# Altium PCB Power_Board_Gan_Cuk.PcbDoc (part 3 of 4)
Units mil, origin at the board's own origin, x right, y up, seen from the top; angles counter-clockwise.
Board outline 9910 x 8913.25 mil, 5 copper layers (Top Layer, Middle 1, HF Layer, Middle 4, Bottom Layer), stack 37.051 mil thick; 394 components, 188 nets, 1156 pads, 1424 vias.
Unrouted connection lines stored in the file: 6.
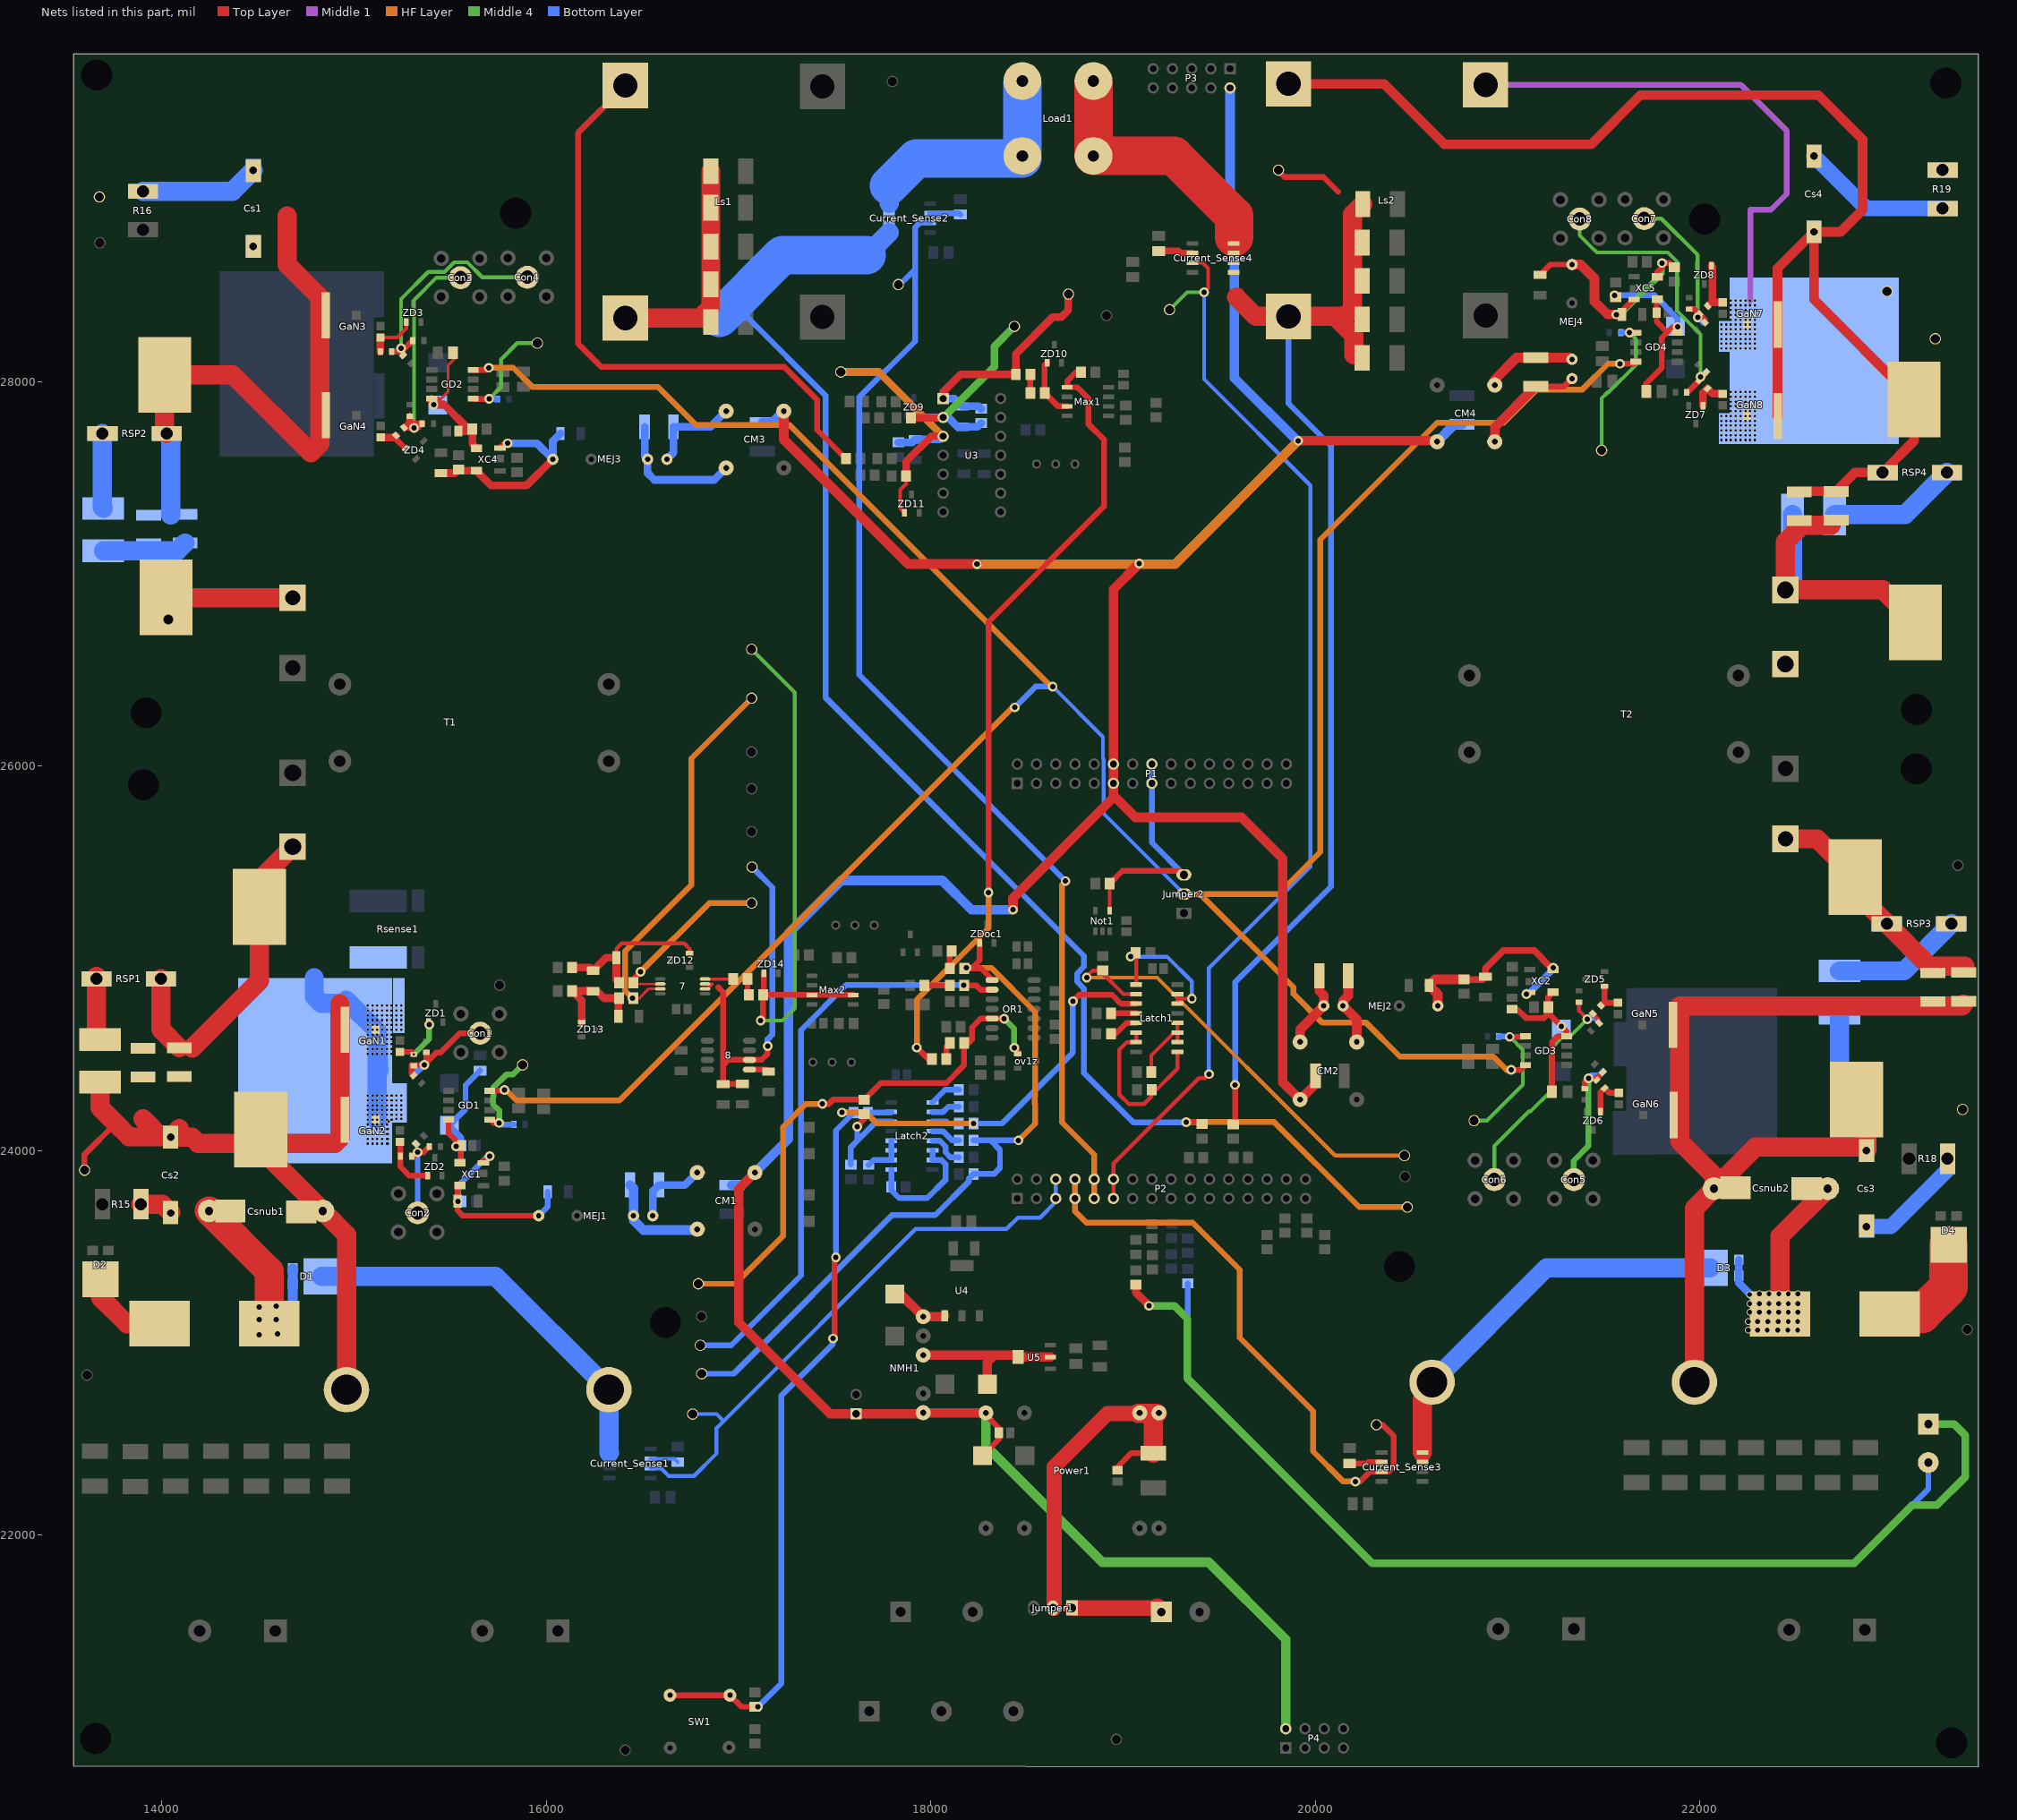
[diagram p6: the nets of this part, all layers, seen from the top]

## Via types
v1: diameter 15, hole 12, Top Layer to Bottom Layer, 976 vias
v2: diameter 50, hole 28, Top Layer to Bottom Layer, 343 vias
v3: diameter 35, hole 20, Top Layer to Bottom Layer, 74 vias
v4: diameter 35, hole 25, Top Layer to Bottom Layer, 30 vias
v5: diameter 100, hole 50, Top Layer to Bottom Layer, 1 vias

## Nets (pads, with @x,y where several pads share a name; then routed paths per layer and width w, separated by ;. In a path a pad name is that pad's centre, name@x,y a point inside that pad or via, vN(x,y) a via of type N, cw(c..) or ccw(c..) an arc to the next point about the centre after c; other vN are vias at no path point) (continued)
GND_SS2: GaN7.S GaN8.S Ls2.4 pad.@22128,27756 pad.@22128,28236 pad.@22225,28108 pad.@22662,28108 R19.1 T2.3 TP19.1 | length 2689.9
  Middle 1 w30: Ls2.4@20886,29544 22214,29544 22453,29305 22453,28976 22371,28894 22265,28894 22265,28424.16 v1(22262.84,28422)
  other v1: 22112.84,27696 22137.84,27696 22162.84,27696 22187.84,27696 22212.84,27696 22237.84,27696 22262.84,27696 22287.84,27696 22112.84,27721 22137.84,27721 22162.84,27721 22187.84,27721 22212.84,27721 22237.84,27721 22262.84,27721 22287.84,27721 22112.84,27746 22137.84,27746 22162.84,27746 22187.84,27746 22212.84,27746 22237.84,27746 22262.84,27746 22287.84,27746 22112.84,27771 22137.84,27771 22162.84,27771 22187.84,27771 22212.84,27771 22237.84,27771 22262.84,27771 22287.84,27771 22112.84,27796 22137.84,27796 22162.84,27796 22187.84,27796 22212.84,27796 22237.84,27796 22262.84,27796 22287.84,27796 22112.84,27821 22137.84,27821 22162.84,27821 22187.84,27821 22212.84,27821 22237.84,27821 22262.84,27821 22287.84,27821 22162.84,27846 22187.84,27846 22212.84,27846 22237.84,27846 22262.84,27846 22287.84,27846 22162.84,27871 22187.84,27871 22212.84,27871 22237.84,27871 22262.84,27871 22287.84,27871 22162.84,27896 22187.84,27896 22212.84,27896 22237.84,27896 22262.84,27896 22287.84,27896 22162.84,27921 22187.84,27921 22212.84,27921 22237.84,27921 22262.84,27921 22287.84,27921 22162.84,27946 22187.84,27946 22212.84,27946 22237.84,27946 22262.84,27946 22287.84,27946 22112.84,28172 22137.84,28172 22162.84,28172 22187.84,28172 22212.84,28172 22237.84,28172 22262.84,28172 22287.84,28172 22112.84,28197 22137.84,28197 22162.84,28197 22187.84,28197 22212.84,28197 22237.84,28197 22262.84,28197 22287.84,28197 22112.84,28222 22137.84,28222 22162.84,28222 22187.84,28222 22212.84,28222 22237.84,28222 22262.84,28222 22287.84,28222 22112.84,28247 22137.84,28247 22162.84,28247 22187.84,28247 22212.84,28247 22237.84,28247 22262.84,28247 22287.84,28247 22112.84,28272 22137.84,28272 22162.84,28272 22187.84,28272 22212.84,28272 22237.84,28272 22262.84,28272 22287.84,28272 22112.84,28297 22137.84,28297 22162.84,28297 22187.84,28297 22212.84,28297 22237.84,28297 22262.84,28297 22287.84,28297 22162.84,28322 22187.84,28322 22212.84,28322 22237.84,28322 22262.84,28322 22287.84,28322 22162.84,28347 22187.84,28347 22212.84,28347 22237.84,28347 22262.84,28347 22287.84,28347 22162.84,28372 22187.84,28372 22212.84,28372 22237.84,28372 22262.84,28372 22287.84,28372 22162.84,28397 22187.84,28397 22212.84,28397 22237.84,28397 22262.84,28397 22287.84,28397 22162.84,28422 22187.84,28422 22212.84,28422 22237.84,28422 22287.84,28422
Net7_2: 7.2 FB13.1 TP41.1 | length 939.9
  Top Layer w12: FB13.1@16460.61,24865.8 7.2@16592.86,24865.8
  Top Layer w15: FB13.1@16453.4,24873 FB13.1@16460.61,24865.8
  Top Layer w30: FB13.1@16453.4,24873 16453.4,24892.4 v2(16490,24929)
  HF Layer w30: v2(16490,24929) 16848,25287 TP41.1@17068,25287
Net7_3: 7.3 FB14.1 TP46.1 | length 2007.7
  Top Layer w15: FB14.1@16453.4,24792 16483,24792 16531.2,24840.2 7.3@16592.86,24840.2
  HF Layer w30: v2(16447,24793) 16409.5,24830.5 16409.5,25036.5 16754,25381 16754,26039 TP46.1@17068,26353
Net7_6: 7.6 7.7 8.6 C91.2 C92.2 TP42.1 | length 1987.5
  Top Layer w15: 7.6@16825.14,24840.2 16838.61,24840.2 16864.2,24865.8 7.7@16825.14,24865.8
  Top Layer w30: 16893,24850 16919,24824 16919,24443 ; C91.2@17019,24346.15 17018,24345.15 C92.2@16919,24345.15 16919,24443 ; v2(17151,24543) 17151,24502 17120,24471 8.6@17056.25,24471 16947,24471 16919,24443
  Bottom Layer w30: TP42.1@17070,25474 17176,25368 17176,24603 17151,24578 v2(17151,24543)
Net7_8: 7.8 R82.2 | length 146.7
  Top Layer w15: 7.8@16825.14,24891.39 16970.98,24891.39 R82.2@16971.6,24892
Net8_5: 8.5 C94.2 | length 104.2
  Top Layer w30: 8.5@17056.25,24421 17145.15,24421 C94.2@17156,24410.15
NetC01_1: C01.1 C02.1 C03.1 C04.1 C05.1 Current_Sense2.1 Current_Sense2.2 Ls1.2 R13.2 TP9.1 | length 9621.9
  Top Layer w30: v2(19329,24147) 19401.4,24147 R13.2@19412,24136.4
  Top Layer w100: Ls1.2@16411.1,28330.67 16800.09,28330.67 16855.42,28386 C02.1@16855.42,28506.25 C03.1@16855.42,28702.5 C05.1@16855.42,29095
  HF Layer w30: v2(19329,24147) 19787,24147 20229,23705 TP9.1@20479,23705
  Bottom Layer w30: Ls1.2@16411.1,28330.67 16900.67,28330.67 17049.33,28330.67 17452,27928 17452,26357 18797,25012 18797,24955.71 18761,24919.71 18761,24878.29 18797,24842.29 18797,24403 19054,24146 19328,24146 v2(19329,24147)
  Bottom Layer w100: 17665.72,28658 Current_Sense2.1@17783.15,28775.43
  Bottom Layer w200: 16900.67,28330.67 17228,28658 17665.72,28658
NetC011_1: C011.1 C022.1 C033.1 C044.1 C055.1 Current_Sense4.1 Current_Sense4.2 Ls2.2 R17.2 TP17.1 | length 6349.8
  Top Layer w20: C055.1@20244.42,28124 C055.1@20244.42,28139
  Top Layer w30: R17.2@19573,24135.4 19583,24145.4 v2(19583,24341) ; TP17.1@19809,29100 19809,29095 19840,29064 20043,29064 20119,28988
  Top Layer w100: 19589.71,28439.29 19690,28339 Ls2.2@19861,28339 20103,28339 ; 20202,28139 20202,28240 20103,28339 ; C011.1@20247.42,28923 20195,28870.58 20195,28380 20154,28339 20103,28339
  Bottom Layer w30: v2(19583,24341) 19583,24874 20082,25373 20082,27665 19861,27886 Ls2.2@19861,28339
NetC13_1: C13.1 C68.1 Jumper1.2 Power1.22 Power1.23 | length 1835.8
  Top Layer w30: C68.1@18971,22335.53 18971,22353 19042.58,22424.58 C13.1@19158,22424.58
  Top Layer w80: Jumper1.2@18642,21619.15 18642,22354 18919,22631 Power1.22@19079,22631
  Top Layer w100: Power1.22@19079,22631 19179,22631 19158,22610 C13.1@19158,22424.58
NetC17_1: C17.1 Current_Sense1.6 | length 149.6
  Bottom Layer w20: Current_Sense1.6@16540.75,22395.83 16665.17,22395.83 C17.1@16683,22378
NetC19_1: C19.1 Current_Sense2.6 | length 161.1
  Bottom Layer w30: Current_Sense2.6@17995.75,28875.83 18147.17,28875.83 C19.1@18154,28869
NetC20_1: C20.1 C22.1 Cd1.1 CP1.1 Cs2.1 Csnub1.1 GaN1.D GaN2.D L1.2 TP7.1 | length 4091.7
  Top Layer w30: TP7.1@13597,23897 13597,23979 13759,24141
  Top Layer w100: Cd1.1@13678,24356 13678,24222 13759,24141 13830,24070 13995,24070 13901,24164 ; 14090,24114.02 Cs2.1@14045,24069.02 14155.98,24069.02 14188,24037 CP1.1@14516,24037 ; 14925,24761.97 14925,24060.98 14901.02,24037 CP1.1@14516,24037 ; L1.2@14960,22755 14960,23561.65 Csnub1.1@14836.65,23685 14516,24005.65 CP1.1@14516,24037
NetC20_2: C20.2 C22.2 CP1.2 RSP1.1 T1.1 | length 1663.5
  Top Layer w100: RSP1.1@13994,24893 13994,24629.8 C22.2@14090,24533.8 ; 14157.8,24531.8 14507,24881 CP1.2@14507,25267 14507,25407 T1.1@14680,25580
NetC21_1: C21.1 C23.1 Cd2.1 CP2.1 T1.4 | length 1444.4
  Top Layer w100: CP2.1@14037,26875 T1.4@14680,26875
  Bottom Layer w100: Cd2.1@13695,27120 14037,27120 ; v5(14033,26762) 14037,26766 14037,27120 ; C23.1@14120,27160.39 14079.61,27120 14037,27120
NetC21_2: C21.2 C23.2 CP2.2 Cs1.1 GaN3.D GaN4.D Ls1.1 R62.2 RSP2.1 TP8.1 | length 6174.8
  Top Layer w30: Ls1.1@16411.1,29540.67 16164,29293.57 16164,28198 16286,28076 17239,28076 17409,27906 17409,27748.2 R62.2@17558.2,27599
  Top Layer w100: RSP2.1@14025,27730 14014,27741 CP2.2@14014,28036 14367,28036 14774,27629 14821,27676 14821,28439 14652,28608 14652,28861.98
  Bottom Layer w100: RSP2.1@14025,27730 14045,27710 14045,27304.8
NetC27_1: C27.1 Current_Sense3.6 | length 169.1
  Top Layer w30: C27.1@20179,22371 20268,22371 20275.2,22378.2 Current_Sense3.6@20345.13,22378.2
NetC29_1: C29.1 Current_Sense4.6 | length 180.5
  Top Layer w35: C29.1@19186,28679 19287,28679 19297.17,28668.83 Current_Sense4.6@19362.25,28668.83
NetC30_1: C30.1 C32.1 Cd3.1 CP3.1 Cs3.1 Csnub2.1 GaN5.D GaN6.D L2.2 TP15.1 | length 5543.2
  Top Layer w100: L2.2@21973,22794 21973,23699.07 Csnub2.1@22074.88,23800.95 ; CP3.1@22816,24303 22868,24251 Cs3.1@22868,23999.02 22850.02,24017 22290.93,24017 Csnub2.1@22074.88,23800.95 ; C32.1@23374,24760 23366,24752 21897,24752 21897,24047 22074.88,23869.12 Csnub2.1@22074.88,23800.95
  Bottom Layer w100: Cd3.1@22727,24714 22727,24296 22868,24155 Cs3.1@22868,23999.02
NetC30_2: C30.2 C32.2 CP3.2 RSP3.1 T2.1 | length 1252.6
  Top Layer w100: T2.1@22446.88,25621 22611,25621 CP3.2@22809,25423 22809,25344 RSP3.1@22974,25179 23194,24959 23379,24959
NetC31_1: C31.1 C33.1 Cd4.1 CP4.1 T2.4 | length 1652
  Top Layer w100: 22521,27241 22446.88,27166.88 T2.4@22446.88,26916 22954,26916 CP4.1@23123,26747 ; C33.1@22541.39,27253 C31.1@22683.61,27253
  Bottom Layer w100: T2.4@22446.88,26916 22483,26952.12 Cd4.1@22483,27309
NetC31_2: C31.2 C33.2 CP4.2 Cs4.1 GaN7.D GaN8.D Ls2.1 RSP4.1 TP16.1 | length 7033.9
  Top Layer w50: Ls2.1@19861,29549 20358,29549 20673,29234 21436,29234 21692,29490 22618,29490 22848,29260 22848,28893 22733.98,28778.98 Cs4.1@22595,28778.98 ; GaN8.D@22405.76,27821 GaN7.D@22405.76,28297 22405.76,28589.74 Cs4.1@22595,28778.98 ; C33.2@22518,27426 22521,27429 C31.2@22710,27429 22808,27527 RSP4.1@22952,27527 23116,27691 CP4.2@23116,27906 22595,28427 Cs4.1@22595,28778.98
NetC36_1: C36.1 C37.1 C60.1 GD1.8 R41.1 XC1.1 | length 790.9
  Top Layer w30: GD1.8@15492.72,24160 15492.72,24087.76 C60.1@15545.24,24035.24 ; XC1.1@15550.2,23935.04 15555.47,23940.32 C60.1@15555.47,24020
  Bottom Layer w30: v2(15530,24020) C37.1@15530,24095 ; R41.1@15557.6,24025 15557.6,24067.4 C37.1@15530,24095 ; C36.1@15655,24415 15579.21,24339.21 15579.21,24214.21 C37.1@15495,24130 C37.1@15530,24095
NetC41_1: C41.1 C42.1 C99.1 GD2.8 R85.1 XC4.1 | length 776.4
  Top Layer w15: 15434,27911 15452,27911 15488.09,27947.09 15488.09,28084.09 15525,28121 C41.1@15525,28150.26
  Top Layer w40: GD2.8@15403.72,27911 15403.72,27889.28 v2(15413,27880) 15467,27880 15594,27753 R85.1@15614.6,27753 ; v2@15423.86,27890.86 15434,27901 ; C99.1@15541.53,27742 15603.6,27742 R85.1@15614.6,27753 ; XC4.1@15636.2,27654.04 15614.6,27675.64 R85.1@15614.6,27753
NetC46_1: C46.1 C47.1 C65.1 GD3.8 R44.1 XC2.1 | length 860
  Top Layer w30: C65.1@21024,24735.47 21049.53,24735.47 21096,24689 21190,24689 21212.4,24711.4 21212.4,24713.6 ; C46.1@21232,24305 21232,24564 21262,24594 GD3.8@21308.28,24594 21308.28,24617.72 v2(21281,24645) 21212.4,24713.6 ; XC2.1@21237.8,24822.96 21212.4,24797.56 R44.1@21212.4,24745 21212.4,24713.6
  Bottom Layer w30: C47.1@21281,24631 v2(21281,24645)
NetC51_1: C51.1 C52.1 C104.1 GD4.8 R88.1 XC5.1 | length 1037.1
  Top Layer w30: C51.1@21722,27948 21722,27990 21803,28071 21803,28228 21831.5,28256.5 ; XC5.1@21780.17,28427.88 21776.47,28424.18 C104.1@21776.47,28359 21776.47,28311.53 21831.5,28256.5 ; 21856.14,28281.14 21831.5,28256.5 ; GD4.8@21883.28,28254 21883.28,28282.72 v2(21885.28,28284.72)
  Bottom Layer w30: v2(21558,28449) 21765,28449 21885.28,28328.72 v2(21885.28,28284.72)
NetC56_1: C56.1 C61.1 C69.1 C70.1 C95.1 C100.1 C106.1 CM1.1 CM2.1 CM3.1 CM4.1 NMH1.1 P1.11 P1.12 P3.2 P4.2 Power1.14 | length 18919.7
  Top Layer w30: C70.1@18279,22421 18354.47,22496.47 C69.1@18354.47,22531 18354.47,22555.53 Power1.14@18279,22631
  Top Layer w50: CM1.1@17085,23885 17001,23801 17001,23105 17476,22630 C106.1@17611,22630 17955,22630 NMH1.1@17960,22635 17961,22634 Power1.14@18287,22634 ; CM3.1@17235,27846 17235,27698 17882,27051 v2@18242,27051 ; C70.1@18269,22411 C70.1@18279,22421 ; v2(18427,25252) 18427,25313 18950,25836 18950,25847 ; v2(19084,27053) 18950,26919 P1.12@18950,26010 P1.11@18950,25910 18950,25847 ; v2(19912,27692) 20629,27692 CM4.1@20634,27687 ; C61.1@20001.2,24388 20001.2,24344.2 CM2.1@19921,24264 19831,24354 19831,25518 19616,25733 19064,25733 18950,25847
  Middle 4 w50: Power1.14@18287,22634 18287,22463 18892,21858 19445,21858 19847,21456 P4.2@19847,20991
  HF Layer w50: v2(18240,27050) 19270,27050 v2(19912,27692)
  Bottom Layer w50: C56.1@16965,23819.8 17019.8,23819.8 CM1.1@17085,23885 17260,24060 17260,25130 17534,25404 18060,25404 18212,25252 v2(18427,25252) ; C95.1@17124,27787.8 17176.8,27787.8 CM3.1@17235,27846 ; P3.2@19557,29528 19557,28802 19579,28780 19579,28019 19906,27692 v2(19912,27692) ; CM4.1@20634,27687 20724.2,27777.2 C100.1@20763,27777.2
NetC57_1: C57.1 CM1.2 MEJ1.1 | length 400.1
  Bottom Layer w40: MEJ1.1@16553.5,23660 16553.5,23788.7 C57.1@16584.8,23820 16720,23820 CM1.2@16785,23885
NetC57_2: C57.2 CM1.3 MEJ1.2 | length 545.6
  Bottom Layer w50: C57.2@16435.2,23820 16453.11,23802.09 MEJ1.2@16453.11,23660 16453.11,23636.89 16504.53,23585.47 16780.47,23585.47 CM1.3@16785,23590
NetC58_2: C58.2 C59.2 MEJ1.7 R42.1 XC1.3 XC1.5 | length 1065.1
  Top Layer w30: XC1.3@15550.2,23816.93 15538.7,23805.43 v2(15538.7,23735) 15538.7,23686.3 15565,23660 MEJ1.7@15960,23660 ; XC1.5@15672.24,23944.45 15679.45,23944.45 v2(15705,23970)
  Bottom Layer w30: v2(15538.7,23735) 15538.7,23813.7 15695,23970 v2(15705,23970) ; MEJ1.7@15960,23660 16006.85,23706.85 C58.2@16006.85,23785
NetC62_1: C62.1 CM2.2 MEJ2.1 | length 404.3
  Top Layer w50: CM2.2@19921,24564 19921,24628.7 MEJ2.1@20044.3,24752 20044.3,24805.7 20022,24828 C62.1@20022,24908
NetC62_2: C62.2 CM2.3 MEJ2.2 | length 384.7
  Top Layer w50: C62.2@20171.61,24908 20171.61,24804.61 20144.69,24777.69 MEJ2.2@20144.69,24752 20216,24680.69 CM2.3@20216,24564
NetC63_2: C63.2 C64.2 MEJ2.7 R45.1 XC2.3 XC2.5 | length 1144.1
  Top Layer w30: XC2.5@21115.76,24822.96 XC2.5@21123.04,24822.96
  Top Layer w35: R45.1@20774,24889.4 20871.25,24889.4 C64.2@20886,24904.15 20886,24947 20978,25039 21139.87,25039 21228.87,24950 v2(21238,24950) ; XC2.5@21094,24814 21099,24819 v2(21099,24813)
  Top Layer w50: MEJ2.7@20637.8,24752 20637.8,24812.35 C63.2@20592.15,24858 20623.55,24889.4 R45.1@20774,24889.4
  Bottom Layer w35: v2(21099,24813) 21099,24823.73 21109.73,24813 21238,24941.27 v2(21238,24950)
NetC72_1: C72.1 R53.1 R61.2 TP33.1 U3.1 | length 1227.5
  Top Layer w40: U3.1@18064,27912 18064,27946 18156,28038 R61.2@18442.6,28038 18442.6,28143.6 18634,28335 18679,28335 18716,28372 TP33.1@18716,28455
  Bottom Layer w40: U3.1@18064,27912 18123,27912 C72.1@18164,27871 18249.4,27871 R53.1@18262,27858.4
NetC72_2: C72.2 R53.2 R60.1 TP31.1 U3.2 ZD9.1 | length 1141.6
  Top Layer w40: R60.1@17896.4,27812 18062.43,27812 U3.2@18064,27813.57
  Middle 4 w40: U3.2@18064,27813.57 18067.06,27813.57 18331,28077.52 18331,28183 TP31.1@18435,28287
  Bottom Layer w40: ZD9.1@17948.59,27820.76 17955.77,27813.57 U3.2@18064,27813.57 18090.43,27813.57 18139.3,27764.7 C72.2@18164,27764.7 18243.1,27764.7 R53.2@18262,27783.6
NetC81_1: C81.1 R65.1 R67.1 TP34.1 U3.3 ZD11.1 | length 1452.2
  Top Layer w20: ZD11.1@17863.6,27317.76 17841,27340.35 17841,27436 17871.4,27466.4 R65.1@17871.4,27509
  Top Layer w40: R65.1@17871.4,27509 17871.4,27584.4 18002.15,27715.15 U3.3@18064,27715.15
  HF Layer w40: TP34.1@17532,28050 17729.15,28050 U3.3@18064,27715.15
  Bottom Layer w40: R67.1@17831,27683.4 17903.25,27683.4 C81.1@17919,27699.15 18048,27699.15 U3.3@18064,27715.15
NetC86_1: C86.1 C88.2 FB13.2 R76.1 ZD12.2 | length 875.2
  Top Layer w20: C86.1@16363.85,25003 16363.85,25048.85 16392,25077 16716.8,25077 16745.24,25048.56 ZD12.2@16745.24,25025.4
  Top Layer w40: R76.1@16133.4,24951 16227,24951 C88.2@16243,24935 16311,25003 C86.1@16363.85,25003 16363.85,24887.75 FB13.2@16378.6,24873
NetC88_1: C88.1 C90.2 FB14.2 R80.1 ZD13.1 | length 537.7
  Top Layer w40: ZD13.1@16182.76,24666.4 16182.76,24780.65 R80.1@16134.4,24829 16242.7,24829 C88.1@16243,24828.7 16263.3,24828.7 16300,24792 FB14.2@16378.6,24792 16374.85,24788.25 C90.2@16374.85,24698
NetC96_1: C96.1 CM3.2 MEJ3.1 | length 490.9
  Bottom Layer w40: MEJ3.1@16626.7,27596 16660.8,27630.1 C96.1@16660.8,27765 16854,27765 CM3.2@16935,27846
NetC96_2: C96.2 CM3.3 MEJ3.2 | length 695.7
  Bottom Layer w40: C96.2@16511.2,27765 16511.2,27611.11 MEJ3.2@16526.31,27596 16526.31,27524.69 16562,27489 16873,27489 CM3.3@16935,27551
NetC97_2: C97.2 C98.2 MEJ3.7 R86.1 XC4.3 XC4.5 | length 1149.8
  Top Layer w30: XC4.5@15758.24,27654.04 15783.2,27679 v2(15798,27679)
  Top Layer w40: C98.2@15451,27523.85 15525.25,27523.85 R86.1@15543,27541.6 15548.67,27535.93 XC4.3@15636.2,27535.93 15712.13,27460 15897.2,27460 MEJ3.7@16033.2,27596
  Bottom Layer w40: v2(15798,27679) 15950.2,27679 MEJ3.7@16033.2,27596 16033.2,27690.35 C97.2@16072.85,27730
NetC101_1: C101.1 CM4.2 MEJ4.1 | length 582.2
  Top Layer w30: C101.1@21147,27975.2 21295.59,27975.2 MEJ4.1@21336,28015.61
  Top Layer w50: CM4.2@20934,27687 20934,27762.2 C101.1@21147,27975.2
NetC101_2: C101.2 CM4.3 MEJ4.2 | length 481.8
  Top Layer w30: MEJ4.2@21327.2,28124.8 MEJ4.2@21336,28116
  Top Layer w50: CM4.3@20934,27982 20934,28011 21047.8,28124.8 C101.2@21147,28124.8 MEJ4.2@21327.2,28124.8
NetC102_2: C102.2 C103.2 MEJ4.7 R89.1 XC5.3 XC5.5 | length 1252.3
  Top Layer w30: C102.2@21170,28555.15 21223.96,28609.11 MEJ4.7@21336,28609.11 ; v2(21567,28349) 21574,28342 21596.85,28342 21596.85,28366.61 XC5.5@21658.13,28427.88 ; XC5.3@21780.17,28545.99 21780.17,28570.17 v2@21804.4,28594.4 ; v2(21804,28617) 21845.4,28617 R89.1@21868,28594.4
  Top Layer w50: MEJ4.7@21336,28609.11 21380.89,28609.11 21453,28537 21453,28417 21521,28349 v2(21567,28349)
  Middle 4 w30: v2(21567,28349) 21589,28349 21804,28564 v2(21804,28617)
NetC105_1: C105.1 NMH1.6 U4.1 | length 310.4
  Top Layer w50: C105.1@17812,23253 17842,23253 NMH1.6@17960,23135 18066.45,23135 U4.1@18071.45,23140
NetC111_2: C111.2 NMH1.4 U5.4 | length 809.2
  Top Layer w50: NMH1.4@17960,22935 18312,22935 ; C111.2@18294,22807 18294,22897 18322,22925 18312,22935 ; U5.4@18621.32,22925 U5.4@18454,22925 18444,22935 18312,22935
NetCd1_2: Cd1.2 RSP1.2 | length 333
  Top Layer w100: Cd1.2@13658,24571 RSP1.2@13658,24904
NetCd2_2: Cd2.2 RSP2.2 | length 392.1
  Bottom Layer w100: RSP2.2@13690,27730 13690,27345 Cd2.2@13695,27340
NetCd3_2: Cd3.2 RSP3.2 | length 683.5
  Bottom Layer w100: Cd3.2@22727,24934 23064,24934 RSP3.2@23309,25179
NetCd4_2: Cd4.2 RSP4.2 | length 674.3
  Bottom Layer w100: Cd4.2@22703,27309 23069,27309 RSP4.2@23287,27527
NetCon1_4: Con1.4 FB1.1 R22.2 R25.2 Rdis1.1 | length 712.1
  Top Layer w30: R22.2@15309.12,24390.88 15299.53,24400.47 15299.53,24445 15309.53,24435 15319.53,24445 v2(15365,24445) 15365,24447 v2@15375,24457 ; Rdis1.1@15375,24510.47 v2@15375,24457 ; Con1.4@15655,24610 15550,24610 15448,24508 15426,24508 v2@15375,24457
  Bottom Layer w30: R25.2@15309.12,24390.88 15310.88,24390.88 v2(15365,24445) 15345,24445 15309.12,24409.12 R25.2@15309.12,24390.88
NetCon2_4: Con2.4 FB2.1 R23.2 R24.2 Rdis2.1 | length 426.7
  Top Layer w30: FB2.1@15299.53,23970 15310,23970 v2(15330,23990) 15360.47,23990 Rdis2.1@15390.47,24020
  Bottom Layer w30: Con2.4@15330,23675 v2(15330,23990)
NetCon3_4: Con3.4 FB3.1 R27.2 R30.2 Rdis3.1 | length 1244.9
  Top Layer w30: R27.2@15290,27820.38 15290,27792 FB3.1@15258.88,27760.88 15309.12,27760.88 v2(15311,27759) 15331.47,27759 Rdis3.1@15353.47,27781 v2@15311,27781
  Middle 4 w20: v2(15311,27759) 15311,28424 15428,28541 Con3.4@15553,28541
  Bottom Layer w30: R30.2@15290,27820.38 15290,27780 v2(15311,27759)
NetCon4_4: Con4.4 FB4.1 R28.2 R29.2 Rdis4.1 | length 1189.5
  Top Layer w30: FB4.1@15195.41,28156.76 15227.76,28156.76 v2(15244,28173) 15254.91,28162.09 R28.2@15254.91,28137.88 ; v2@15254.91,28163.44 Rdis4.1@15304.47,28213
  Middle 4 w20: v2(15244,28173) 15244,28430 15385,28571 15469.86,28571 15519.86,28621 15588.15,28621 15666.15,28543 Con4.4@15900,28543
NetCon5_4: Con5.4 FB5.1 R32.2 R35.2 Rdis5.1 | length 809.2
  Top Layer w30: Rdis5.1@21403,24321.53 21403,24356 v2(21422,24375) 21455,24375 FB5.1@21464.12,24365.88 21464.12,24375.36 R32.2@21495.88,24407.12
  Middle 4 w30: Con5.4@21345,23848 21345,23946 21422,24023 v2(21422,24375)
  Bottom Layer w30: v2(21422,24375) 21437,24390 21477,24390 21477,24389.24 R35.2@21495.88,24408.12
NetCon6_4: Con6.4 FB6.1 R33.2 R34.2 Rdis6.1 | length 1355.5
  Top Layer w20: Rdis6.1@21373,24771.47 21373,24726 v2(21416,24683) FB6.1@21444.12,24711.12 21475.88,24679.36 R33.2@21475.88,24663.88
  Middle 4 w20: Con6.4@20932,23848 20932,24022.89 21113.61,24204.5 21122.5,24204.5 21226,24308 21226,24530 21288,24592 21325,24592 v2(21416,24683)
  HF Layer w20: v2@21416,24666.89 v2(21416,24683)
  Bottom Layer w20: v2(21416,24683) 21417,24682 21457.76,24682 R34.2@21477.88,24661.88
NetCon7_4: Con7.4 FB7.1 R37.2 R40.2 Rdis7.1 | length 864.1
  Top Layer w30: Rdis7.1@21945,28377.47 21973.77,28377.47 FB7.1@22000.12,28351.12 21990,28341 v2(21990,28334) ; FB7.1@22003.62,28347.62 22026.88,28324.36 R37.2@22026.88,28308.88
  Middle 4 w20: Con7.4@21712,28848 21801,28848 21990,28659 v2(21990,28334)
  Bottom Layer w30: v2(21990,28334) 22017.12,28306.88 R40.2@22025.88,28306.88
NetCon8_4: Con8.4 FB8.1 R38.2 R39.2 Rdis8.1 | length 1457
  Top Layer w30: Rdis8.1@21932.53,27944 21937.24,27944 FB8.1@21999.12,28005.88 21999.12,28013.36 22010.76,28025 v2(22005,28025)
  Middle 4 w20: Con8.4@21376,28846 21376,28761.15 21451.15,28686 21452,28686 21466,28672 21834,28672 21883,28623 21883,28367 22005,28245 v2(22005,28025)
  Bottom Layer w30: v2(22005,28025) 22009.76,28025 R39.2@22032.88,28048.12
NetCs1_2: Cs1.2 R16.2 | length 619.1
  Bottom Layer w100: R16.2@13901,28990 14366.02,28990 Cs1.2@14475,29098.98
NetCs2_2: Cs2.2 R15.2 | length 172.7
  Top Layer w100: R15.2@13890,23720 14002.17,23720 Cs2.2@14045,23677.17
NetCs3_2: Cs3.2 R18.2 | length 601.2
  Bottom Layer w80: Cs3.2@22868,23604.02 22995.02,23604.02 23290,23899 R18.2@23290,23956
NetCs4_2: Cs4.2 R19.2 | length 782.1
  Bottom Layer w80: Cs4.2@22595,29173.98 22867.98,28901 R19.2@23264,28901
NetCsnub1_2: Csnub1.2 D1.1 L_snub1.2 | length 1107.6
  Top Layer w50: L_snub1.2@14585,23120 v2(14595,23120)
  Top Layer w100: L_snub1.2@14557.56,23098.58 L_snub1.2@14557.56,23185
  Top Layer w150: Csnub1.2@14245,23685 14557.56,23372.44 L_snub1.2@14557.56,23185
  Bottom Layer w50: v2(14505,23040) v2(14505,23120) ; v2(14595,23120) 14680.39,23205.39 D1.1@14680.39,23303.66 D1.1@14680.39,23386.34
  other v2: 14600,23045 14505,23185 14595,23190
NetCsnub2_2: Csnub2.2 D3.1 L_snub2.2 | length 1027.8
  Top Layer w100: L_snub2.2@22418.44,23148.42 22418.44,23552.86 Csnub2.2@22666.54,23800.95
  Bottom Layer w40: D3.1@22203.6,23431 D3.1@22203.6,23348.32 22203.6,23310.4 v4(22311,23203)
  other v4: 22252,23065 22302,23065 22352,23065 22407,23065 22459,23065 22510,23065 22252,23110 22302,23110 22356,23110 22408,23110 22461,23110 22510,23110 22261,23158 22311,23158 22361,23158 22411,23158 22461,23158 22511,23158 22261,23203 22361,23203 22411,23203 22461,23203 22511,23203 22260,23250 22311,23253 22361,23253 22412,23253 22461,23253 22511,23253
NetCurrent_Sense1_3: Current_Sense1.3 Current_Sense1.4 D1.2 L1.1 | length 2070.1
  Bottom Layer w100: D1.2@14830,23345 15735,23345 L1.1@16325,22755 16325,22427.44 16328.15,22427.44
NetCurrent_Sense1_7: Current_Sense1.7 P2.5 P2.6 TP5.1 | length 3087.3
  Bottom Layer w20: Current_Sense1.7@16540.75,22345.63 16596.37,22345.63 16636,22306 16768,22306 16885,22423 16885,22555 16921.5,22591.5 ; TP5.1@16761,22628 16885,22628 16921.5,22591.5 ; P2.6@18650,23850 P2.5@18650,23750 18650,23732 18568,23650 18453,23650 18394,23591 17921,23591 16921.5,22591.5
NetCurrent_Sense2_3: Current_Sense2.3 Current_Sense2.4 Load1.1 | length 1234.3
  Bottom Layer w100: Current_Sense2.4@17783.15,28926.02 17783.15,29019.15
  Bottom Layer w200: 17783.15,29019.15 17924,29160 18476,29160 Load1.1@18476,29174 Load1.1@18476,29550
NetCurrent_Sense2_7: Current_Sense2.7 P2.9 P2.10 TP6.1 | length 5900.9
  HF Layer w30: v2(18701,25401) 18682,25382 18682,24146 18850,23978 P2.10@18850,23850 P2.9@18850,23750
  Bottom Layer w30: TP6.1@17831,28505 17840,28505 17918,28583 ; Current_Sense2.7@17995.75,28825.63 17941.63,28825.63 17918,28802 17918,28583 ; v2(18701,25401) 17628,26474 17628,27920 17918,28210 17918,28583
NetCurrent_Sense3_3: Current_Sense3.3 Current_Sense3.4 D3.2 L2.1 | length 2040.2
  Top Layer w100: Current_Sense3.4@20557.73,22428.39 L2.1@20557.73,22704.73 ; L2.1@20557.73,22743.73 L2.1@20608,22794
  Bottom Layer w100: L2.1@20608,22794 21203.66,23389.66 D3.2@22053.99,23389.66
NetCurrent_Sense3_7: Current_Sense3.7 P2.7 P2.8 TP13.1 | length 3044.3
  Top Layer w30: v2(20209,22277) 20234,22277 20285,22328 Current_Sense3.7@20345.13,22328 20383,22328 20408,22353 20408,22514 20350,22572 TP13.1@20318,22572
  HF Layer w30: P2.8@18750,23850 P2.7@18750,23750 18750,23683 18809,23624 19363,23624 19607,23380 19607,23026 19989,22644 19989,22434 20146,22277 v2(20209,22277)
NetCurrent_Sense4_3: Current_Sense4.3 Current_Sense4.4 Load1.2 | length 1346.2
  Top Layer w200: Load1.2@18846,29550 Load1.2@18846,29174 19265,29174 19577,28862 19577,28752
NetCurrent_Sense4_7: Current_Sense4.7 P2.11 P2.12 TP14.1 | length 5830.2
  Top Layer w20: P2.11@18950,23750 P2.12@18950,23850 18950,23931 19395.5,24376.5 19426.5,24376.5 v2(19447,24397) ; Current_Sense4.7@19362.25,28618.63 19413.37,28618.63 19443,28589 19443,28486 v2(19422,28465)
  Middle 4 w20: TP14.1@19242,28374 19333,28465 v2(19422,28465)
  Bottom Layer w20: v2(19422,28465) 19422,28013 19975,27460 19975,25477 19447,24949 v2(19447,24397)
NetD2_2: D2.2 L_snub1.1 | length 459.1
  Top Layer w100: D2.2@13680,23330 13680,23235 13816.42,23098.58 L_snub1.1@13987.56,23098.58
NetD4_2: D4.2 L_snub2.1 | length 585.3
  Top Layer w200: L_snub2.1@22988.44,23148.42 23154.42,23148.42 23295.34,23289.34 D4.2@23295.34,23509.39
NetFB1_2: FB1.2 FB2.2 GaN1.G GaN2.G ZD1.1 ZD2.1 | length 582.3
  Top Layer w20: ZD1.1@15387.6,24667.76 ZD1.1@15387.6,24677.4
  Top Layer w30: GaN2.G@15237.91,24039.65 15240.47,24037.09 FB2.2@15240.47,23970 15240.47,23914.53 15287.24,23867.76 ZD2.1@15382.6,23867.76 ; GaN1.G@15240.47,24509.96 GaN1.G@15237.91,24512.52 15297.01,24512.52 v1(15310,24499.53)
  Middle 4 w30: v1(15310,24499.53) 15310.53,24499.53 15390,24579 v2(15390,24655)
  HF Layer w20: v2@15390,24640 v2(15390,24655)
NetFB3_2: FB3.2 FB4.2 GaN3.G GaN4.G ZD3.1 ZD4.1 | length 434.2
  Top Layer w20: GaN3.G@15136.81,28229.65 15223.65,28229.65 15271.6,28277.6 ZD3.1@15271.6,28310.76
  Top Layer w30: FB3.2@15217.12,27719.12 15217.12,27701.07 ZD4.1@15268.15,27650.04
  Top Layer w40: FB4.2@15136.35,28156.76 15136.35,28229.19 GaN3.G@15136.81,28229.65 ; GaN4.G@15137.91,27709.65 15207.65,27709.65 FB3.2@15217.12,27719.12
NetFB5_2: FB5.2 FB6.2 GaN5.G GaN6.G ZD5.1 ZD6.1 | length 408.9
  Top Layer w30: ZD6.1@21484.4,24198.24 ZD6.1@21484.4,24201.24 21484.4,24302.64 FB5.2@21505.88,24324.12 21529.88,24300.12 21577.56,24300.12 GaN6.G@21581.33,24296.35 ; FB6.2@21485.88,24752.88 21501.35,24768.35 21517,24768.35 ; ZD5.1@21504.24,24854.6 21504.24,24781.11 21517,24768.35 ; GaN5.G@21575.09,24768.35 21517,24768.35
NetFB7_2: FB7.2 FB8.2 GaN7.G GaN8.G ZD7.1 ZD8.1 | length 441.7
  Top Layer w40: ZD7.1@22018.4,27875.24 22018.4,27941.64 FB8.2@22040.88,27964.12 22068.65,27936.35 GaN8.G@22119.93,27936.35 ; ZD8.1@22061.4,28602.24 22066.8,28596.85 22066.8,28417.8 22061.35,28412.35 GaN7.G@22119.93,28412.35
NetFB9_1: FB9.1 OR1.1 R81.1 ROC.2 TP35.1 ZDoc1.1 | length 3844.8
  Top Layer w30: ZDoc1.1@18254.6,25079.76 18254.6,24988.6 18213,24947 18261,24947 18318.75,24889.25 OR1.1@18318.75,24886
  HF Layer w30: v2(18186,24950) 18314,24950 18543,24721 18543,24285.71 18541,24283.71 18541,24242.29 18543,24240.29 18543,24139 v2(18456.2,24052.2)
  Bottom Layer w30: TP35.1@16808,22838 16974,22838 17799,23663 18023.07,23663 18197.19,23837.12 18197.19,23852.79 R81.1@18221.4,23877 18328,23877 18360,23909 18360,24002 18309.8,24052.2 ; ROC.2@18221.4,24052.2 18309.8,24052.2 ; v2(18456.2,24052.2) 18309.8,24052.2
NetFB9_2: FB9.2 R56.1 | length 95.1
  Top Layer w30: FB9.2@18098.6,24947 18098.6,25028.2 R56.1@18108.4,25038
NetFB10_1: FB10.1 OR1.2 TP36.1 | length 3050.2
  Top Layer w30: FB10.1@18173.4,24859 18236,24859 18259,24836 OR1.2@18318.75,24836
  Bottom Layer w30: TP36.1@16801,22986 16962,22986 17325,23349 17325,24626 17559,24860 v2(18172,24860)
NetFB10_2: FB10.2 R66.1 | length 131.6
  Top Layer w30: R66.1@17967.4,24858 18097.6,24858 FB10.2@18098.6,24859
NetFB11_1: FB11.1 Max1.3 ZD10.1 | length 308.1
  Top Layer w30: ZD10.1@18604.6,28097.76 18592.4,28085.56 FB11.1@18592.4,27941 18662.42,27870.98 Max1.3@18709.73,27870.98
NetFB11_2: FB11.2 R61.1 | length 97.1
  Top Layer w30: R61.1@18517.4,28038 18517.4,27941.2 FB11.2@18517.6,27941
NetFB12_1: FB12.1 OR1.5 ov1z.1 Rov.1 TP38.1 | length 2820.9
  Top Layer w30: v2(17436,24242) 17470,24242 17491.4,24263.4 Rov.1@17653,24263.4 17740.6,24351 18081,24351 18173.4,24443.4 FB12.1@18173.4,24559 18197,24559 18214,24576 18214,24640 18260,24686 OR1.5@18318.75,24686 18377,24686 18378,24685 v2(18382,24685) ; v2(18434,24534) 18451.76,24516.24 ov1z.1@18451.76,24502.4
  Middle 1 w30: v2@17430,24236 v2(17436,24242)
  Middle 4 w30: v2(18382,24685) 18434,24633 v2(18434,24534)
  HF Layer w30: TP38.1@16791,23306 16983,23306 17232,23555 17232,24123 17351,24242 v2(17436,24242)
NetFB12_2: FB12.2 R68.1 | length 91.1
  Top Layer w30: R68.1@18081.4,24475 18081.4,24541.8 FB12.2@18098.6,24559
NetFB15_1: FB15.1 Max2.3 Max2.6 TP47.1 ZD14.1 | length 2886.8
  Top Layer w30: v2(17115,24675) 17127.4,24687.4 FB15.1@17127.4,24809 ; ZD14.1@17131.6,24921.76 17131.6,24813.2 FB15.1@17127.4,24809 ; Max2.3@17381.73,24808.98 FB15.1@17127.4,24809 ; Max2.3@17381.73,24808.98 Max2.6@17596.3,24808.98
  Middle 4 w20: TP47.1@17068,26607 17292,26383 17292,24739 17228,24675 v2(17115,24675)
NetFB15_2: FB15.2 R82.1 | length 85.6
  Top Layer w30: R82.1@17046.4,24892 17046.4,24815.2 FB15.2@17052.6,24809
NetGaN1_S: GaN1.S GaN2.S pad.@14731,24414 pad.@15128,24415 pad.@15232,24753 pad.@15234,24247 Rsense1.1 | length 1267.4
  Bottom Layer w100: 14791.93,24897 14791.93,24800.08 14827.08,24764.93 14942.92,24764.93 14959,24781 15120,24620 v1(15120,24602.87) v1(15120,24577.87) 15120.06,24576.65 15120.12,24575.42 15121.1,24555.38 15121.16,24554.16 15121.23,24552.93 15121.29,24551.71 15121.35,24550.48 15122.33,24530.44 15122.39,24529.22 15122.45,24527.99 15122.51,24526.77 15122.57,24525.54 15123.55,24505.5 15123.61,24504.28 15123.67,24503.05 15123.74,24501.83 15123.8,24500.6 pad.@15128,24415 ; pad.@15120,24155 v1(15120,24160) v1(15120,24185) v1(15120,24210) v1(15120,24235) v1(15120,24260) v1(15120,24285) v1(15120,24502.87) 15120.21,24500.62 15120.41,24498.36 pad.@15128,24415 ; v1(15120,24527.87) 15120.12,24526.11 15120.25,24524.35 15121.51,24506.53 15121.64,24504.76 15121.76,24503 15121.89,24501.24 15122.01,24499.47 pad.@15128,24415
  other v1: 15070,24035 15095,24035 15120,24035 15145,24035 15170,24035 15175,24035 15070,24060 15095,24060 15120,24060 15145,24060 15170,24060 15175,24060 15070,24085 15095,24085 15120,24085 15145,24085 15170,24085 15175,24085 15070,24110 15095,24110 15120,24110 15145,24110 15170,24110 15175,24110 15070,24135 15095,24135 15120,24135 15145,24135 15170,24135 15180,24150 15070,24160 15095,24160 15145,24160 15170,24160 15195,24160 15220,24165 15245,24165 15070,24185 15095,24185 15145,24185 15170,24185 15195,24185 15220,24185 15245,24185 15070,24210 15095,24210 15145,24210 15170,24210 15195,24210 15220,24210 15245,24210 15070,24235 15095,24235 15145,24235 15170,24235 15195,24235 15220,24235 15245,24235 15070,24260 15095,24260 15145,24260 15170,24260 15195,24260 15220,24260 15245,24260 15070,24285 15095,24285 15145,24285 15170,24285 15195,24285 15220,24285 15245,24285 15070,24502.87 15095,24502.87 15145,24502.87 15170,24502.87 15195,24502.87 15070,24527.87 15095,24527.87 15145,24527.87 15170,24527.87 15195,24527.87 15070,24552.87 15095,24552.87 15120,24552.87 15145,24552.87 15170,24552.87 15195,24552.87 15070,24577.87 15095,24577.87 15145,24577.87 15170,24577.87 15195,24577.87 15070,24602.87 15095,24602.87 15145,24602.87 15170,24602.87 15195,24602.87 15070,24627.87 15095,24627.87 15120,24627.87 15145,24627.87 15170,24627.87 15195,24627.87 15220,24627.87 15245,24627.87 15070,24652.87 15095,24652.87 15120,24652.87 15145,24652.87 15170,24652.87 15195,24652.87 15220,24652.87 15245,24652.87 15070,24677.87 15095,24677.87 15120,24677.87 15145,24677.87 15170,24677.87 15195,24677.87 15220,24677.87 15245,24677.87 15070,24702.87 15095,24702.87 15120,24702.87 15145,24702.87 15170,24702.87 15195,24702.87 15220,24702.87 15245,24702.87 15070,24727.87 15095,24727.87 15120,24727.87 15145,24727.87 15170,24727.87 15195,24727.87 15220,24727.87 15245,24727.87 15070,24752.87 15095,24752.87 15120,24752.87 15145,24752.87 15170,24752.87 15195,24752.87 15220,24752.87 15245,24752.87
NetGD1_1: GD1.1 R21.1 TP20.1 | length 531.5
  Top Layer w30: GD1.1@15707.28,24160 15724.28,24143 v2(15754,24143)
  Middle 4 w30: v2(15754,24143) 15754,24208.29 15723,24239.29 15723,24280.71 15724,24281.71 15724,24326.71 15791.29,24394 15825,24394 TP20.1@15876,24445
  Bottom Layer w30: v2(15754,24143) 15762,24135 R21.1@15830.47,24135
NetGD1_4: GD1.4 GD2.4 GD3.4 GD4.4 Jumper2.2 | length 15466.9
  Top Layer w30: GD2.4@15618.28,28061 15689,28061 v2(15700,28072) ; GD1.4@15705.28,24310 15782,24310 v2(15782,24314) ; v2(21020,24419) 21068.72,24419 GD3.4@21093.72,24444 ; v2(21585,28093) 21657.72,28093 GD4.4@21668.72,28104
  HF Layer w30: v2(15700,28072) 15827,28072 15926,27973 16579,27973 16777,27775 17264,27775 v2@18630,26409 ; v2(15782,24314) 15791,24314 15845,24260 16380,24260 18425,26305 v2(18437,26305) ; Jumper2.2@19317,25334 19401,25334 ; v2(21020,24419) 20995,24419 20926,24488 20441,24488 20265,24664 20037,24664 19886,24815 19886,24849 19401,25334 ; v2(21585,28093) 21524,28093 21390,27959 21154,27959 20981,27786 20634,27786 20026,27178 20026,25553 19807,25334 19401,25334
  Bottom Layer w20: v2(18634,26413) 18896,26151 18896,26037.57 18899.53,26034.04 18899.53,25751.47 Jumper2.2@19317,25334
  Bottom Layer w30: v2(18437,26305) 18545,26413 v2(18634,26413)
NetGD2_1: GD2.1 R26.1 TP21.1 | length 577.1
  Top Layer w30: GD2.1@15624.28,27911 15625.28,27910 v2(15702,27910)
  Middle 4 w20: v2(15702,27910) 15764,27972 15764,28116 15848,28200 TP21.1@15953,28200
  Bottom Layer w30: v2(15702,27910) R26.1@15745.47,27910
NetGD3_1: GD3.1 R31.1 TP22.1 | length 749.1
  Top Layer w30: v2(21012,24591) 21090.72,24591 GD3.1@21093.72,24594
  Middle 4 w20: TP22.1@20827,24155 20894,24155 21080,24341 21080,24523 v2(21012,24591)
  Bottom Layer w30: R31.1@20954.53,24592 21011,24592 v2(21012,24591)
NetGD4_1: GD4.1 R36.1 TP23.1 | length 784.7
  Top Layer w30: v2(21635,28255) 21669.72,28255 GD4.1@21670.72,28254
  Middle 4 w20: TP23.1@21490,27642 21490,27912.64 21521.36,27944 21525,27944 21668.72,28087.72 21668.72,28221.28 v2(21635,28255)
  Bottom Layer w30: R36.1@21589.53,28255 v2(21635,28255)
NetGrid1_1: Grid1.1 R5.1 | length 5748.9
  Top Layer w40: R5.1@19067,23301.6 19067,23261 19135,23193 v2(19135,23191)
  Middle 4 w40: v2(19135,23191) 19268,23191 19335,23124 19335,22813 20296,21852 22804,21852 23106,22154 23235,22154 23382,22301 23382,22518 23324.2,22575.8 Grid1.1@23190,22575.8 Grid1.1@23195.2,22581
NetGrid1_2: Grid1.2 R11.1 | length 5044.7
  Bottom Layer w30: R11.1@19337,23307.6 19337,22811 20296,21852 22804,21852 23190,22238 Grid1.2@23190,22376
NetJumper1_1: "Logic supply1.1" Jumper1.1 | length 472.3
  Top Layer w80: Jumper1.1@18735.21,21619.15 19178.15,21619.15
  Top Layer w100: 19178.15,21619.15 19198.94,21598.36
NetJumper2_3: Jumper2.3 Not1.4 P1.15 P1.16 R69.1 | length 1206.7
  Top Layer w20: Not1.4@18930.4,25248.15 18930.4,25387 R69.1@18931.4,25388
  Top Layer w30: R69.1@18931.4,25388 18997.4,25454 19297,25454 Jumper2.3@19317,25434
  Bottom Layer w30: P1.16@19150,26010 P1.15@19150,25910 19150,25601 Jumper2.3@19317,25434
NetLatch1_1: Latch1.1 Latch1.14 Latch1.15 R47.1 | length 782.6
  Top Layer w20: v2(19039,25008) 19045.6,25008 R47.1@19066.6,25029 ; Latch1.1@19068.72,24863 R47.1@19068.72,25008 ; Latch1.14@19283.28,24763 19283.28,24794 19287.28,24790 19306.28,24790 ; Latch1.15@19283.28,24813 19306.28,24790 ; v2(19358,24790) 19306.28,24790
  Bottom Layer w20: v2(19039,25008) 19229,25008 19358,24879 v2(19358,24790)
NetLatch1_2: Latch1.2 NOTR.2 TP30.1 | length 2378.8
  Top Layer w20: v2(18811,24899) 18806,24899 18842.6,24935.6 NOTR.2@18894,24935.6 18894,24921 19002,24813 Latch1.2@19068.72,24813
  HF Layer w20: v2(18811,24899) 19177,24899 20103,23973 TP30.1@20464,23973
NetLatch1_3: Latch1.3 R49.2 Res.2 Rst.1 SW1.2 | length 5852.6
  Top Layer w30: SW1.2@16643,21165 SW1.2@16955,21165 17014.8,21105.2 R49.2@17085,21105.2 v2(17100.8,21105.2) ; v2(17491,23021) 17496,23021 17500,23025 17500,23437 v2(17506,23443) ; v2(18739,24776) 18772,24809 18943,24809 18989,24763 Latch1.3@19068.72,24763
  HF Layer w30: v2(17538,24197) 17662,24197 17719.2,24139.8 v2(18221.4,24139.8)
  Bottom Layer w30: v2(17100.8,21105.2) 17223,21227.39 17223,22725 17491,22993 v2(17491,23021) ; v2(17506,23443) 17506,24103.8 Rst.1@17599.2,24197 v2(17538,24197) ; v2(18221.4,24139.8) 18370.8,24139.8 18739,24508 v2(18739,24776)
NetLatch1_4: Latch1.4 Rlatch.1 | length 130.3
  Top Layer w30: Rlatch.1@18938.4,24713 Latch1.4@19068.72,24713
NetLatch1_5: Latch1.5 R54.1 | length 155.5
  Top Layer w30: R54.1@18936.4,24607 18962,24607 19018,24663 Latch1.5@19068.72,24663
NetLatch1_6: Latch1.6 Latch1.7 Latch1.9 R48.1 | length 894.8
  Top Layer w20: Latch1.6@19068.72,24613 Latch1.7@19068.72,24563 19020,24563 18981,24524 18981,24290 19030,24241 19109,24241 19148.4,24280.4 R48.1@19148.4,24315 19173,24315 19283.28,24425.28 Latch1.9@19283.28,24513
NetLatch1_10: Latch1.10 Latch1.11 Latch1.12 R83.1 | length 371.4
  Top Layer w20: R83.1@19147.4,24408 19147.4,24494.4 19266,24613 Latch1.11@19283.28,24613 ; Latch1.10@19283.28,24563 Latch1.11@19283.28,24613 ; Latch1.12@19283.28,24663 Latch1.11@19283.28,24613
NetLatch2_1: Latch2.1 R75.1 | length 164.2
  Bottom Layer w30: Latch2.1@18009.28,24250 18074.28,24315 R75.1@18146.6,24315
NetLatch2_2: Latch2.2 R77.1 | length 148.7
  Bottom Layer w30: Latch2.2@18009.28,24200 18064,24200 18091.4,24227.4 R77.1@18146.6,24227.4
NetLatch2_3: Latch2.3 Res.1 | length 141.5
  Bottom Layer w30: Latch2.3@18009.28,24150 18081,24150 18091.2,24139.8 Res.1@18146.6,24139.8
NetLatch2_4: Latch2.4 ROC.1 | length 157.1
  Bottom Layer w30: Latch2.4@18009.28,24100 18063,24100 18110.8,24052.2 ROC.1@18146.6,24052.2
NetLatch2_5: Latch2.5 R84.1 | length 190.8
  Bottom Layer w30: Latch2.5@18009.28,24050 18047,24050 18077,24020 18077,23989 18101.4,23964.6 R84.1@18146.6,23964.6
NetLatch2_6: Latch2.6 Latch2.7 Latch2.9 R93.1 | length 653.1
  Bottom Layer w30: Latch2.9@17794.72,23900 17794.6,23899.88 R93.1@17794.6,23811 17794.6,23792.4 17835,23752 17982,23752 18076,23846 18076,23929 18055,23950 Latch2.7@18009.28,23950 Latch2.6@18009.28,24000
NetLatch2_10: Latch2.10 Latch2.11 Latch2.12 R94.1 | length 228.3
  Bottom Layer w30: R94.1@17677,23924.4 17702.6,23950 Latch2.10@17794.72,23950 Latch2.11@17794.72,24000 Latch2.12@17794.72,24050
NetLatch2_14: Latch2.14 R79.2 Rov.2 | length 510.1
  Top Layer w30: v2(17617,24123) 17617,24126 17653,24162 Rov.2@17653,24188.6
  Bottom Layer w30: R79.2@17584,23926.4 17584,24016.53 17617,24049.53 ; v2(17617,24123) 17617,24049.53 ; Latch2.14@17794.72,24150 17717.47,24150 17617,24049.53
NetLatch2_15: Latch2.15 Rst.2 | length 122
  Bottom Layer w30: Rst.2@17674,24197 17791.72,24197 Latch2.15@17794.72,24200
NetMax1_1: Max1.1 R52.1 R68.2 | length 4176.1
  Top Layer w30: v2(17927,24535) 17987,24475 R68.2@18006.6,24475 ; v2(18300,25342) 18300,26750 18901,27351 18901,27698 18819,27780 18819,27914 18762.02,27970.98 Max1.1@18709.73,27970.98 18709.73,28003.73 18755,28049 R52.1@18780.6,28049
  HF Layer w30: v2(17927,24535) 17927,24784 18300,25157 v2(18300,25342)